# Altium PCB toasterBigBoard.PcbDoc
Units mil, origin at the board's own origin, x right, y up, seen from the top; angles counter-clockwise.
Board outline 2500 x 1000 mil, 2 copper layers (Top Layer, Bottom Layer); 28 components, 12 nets, 73 pads, 18 vias.
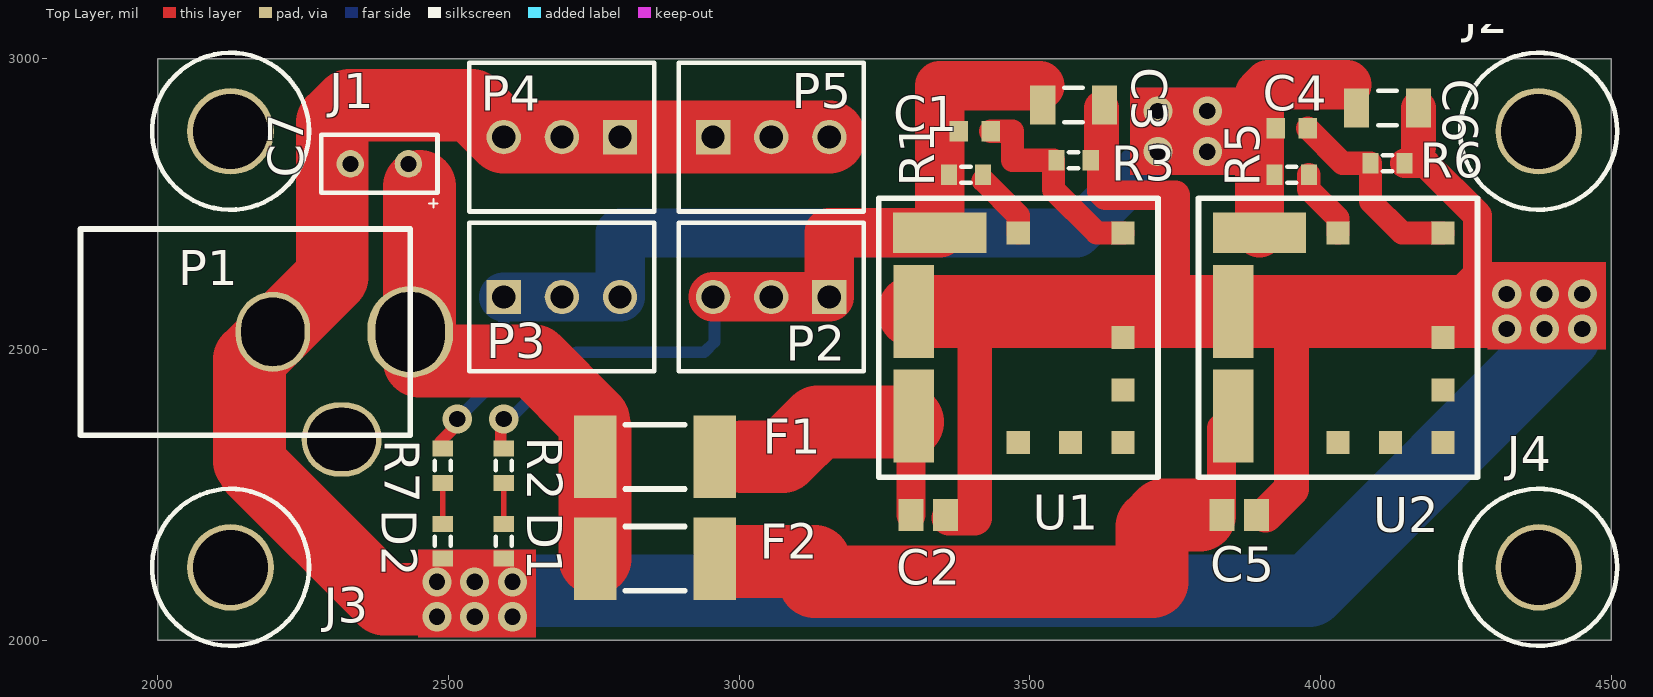
[diagram p0: Top Layer view]
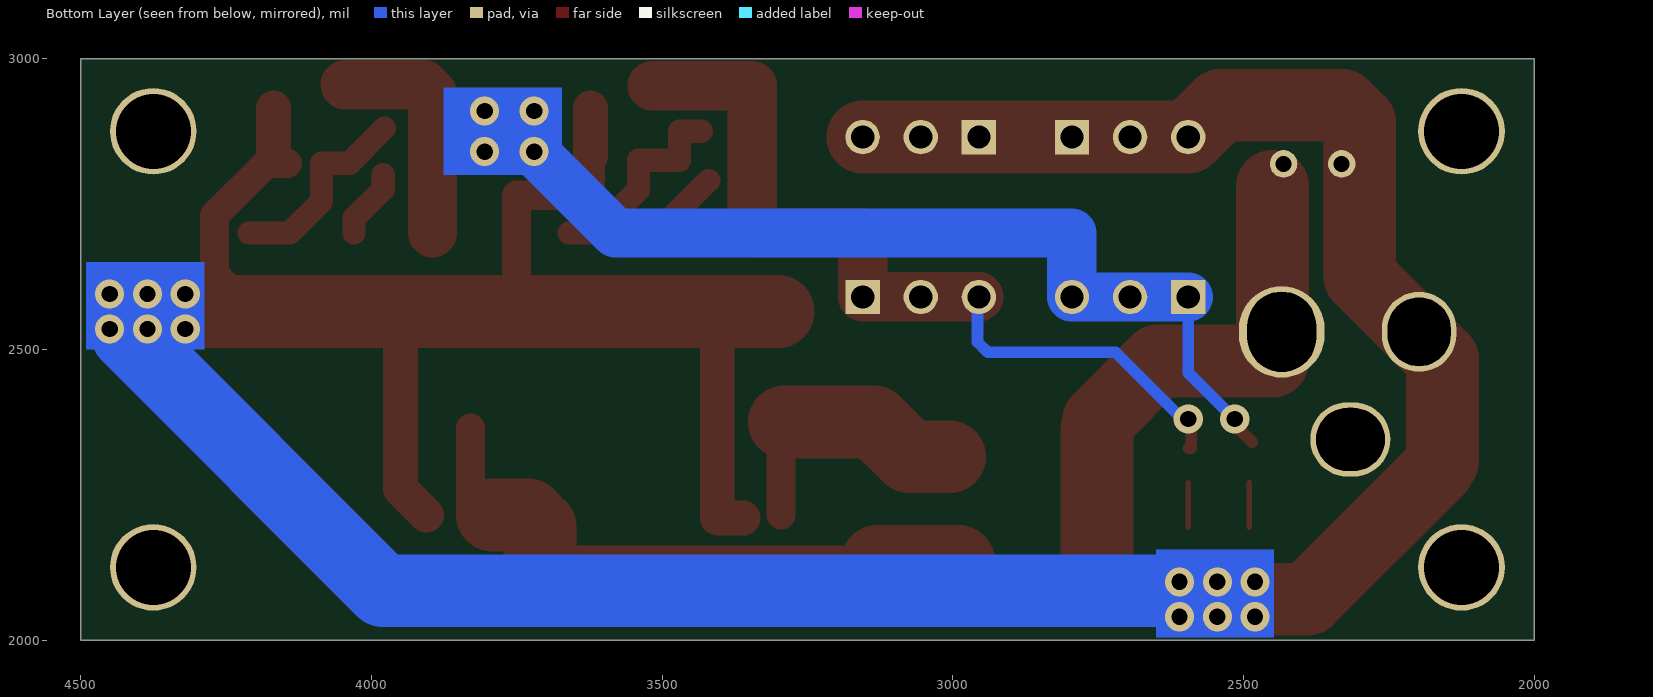
[diagram p1: Bottom Layer view, seen from below]

## Layer stack, top to bottom
Top Layer: signal copper 1.4
Dielectric: dielectric 12.6, FR-4, Dk 4.8
Bottom Layer: signal copper 1.4

## Board outline
2000,2000 4500,2000 4500,3000 2000,3000

## Design rules (kind name [scope] priority, off if disabled: settings)
Clearance [All] p1: gap=10
PolygonConnect [All] p1: connectstyle=Relief reliefconductorwidth=10 reliefentries=4 polygonreliefangle="90 Angle"
RoutingVias [All] p1: holewidth=28 width=50 viastyle="Through Hole" minholewidth=28 minwidth=50 maxholewidth=28 maxwidth=50
SilkscreenOverComponentPads [All] p1: minsilkscreentomaskgap=10
SolderMaskExpansion [All] p1: expansion=4
Width "Schematic Width Constraint_7" [InNet('NetC2_2')] p1: maxlimit=200 minlimit=50 preferedwidth=125 minimp=50.000000 maximp=50.000000 favimp=50.000000
Width "Schematic Width Constraint_6" [InNet('NetC5_2')] p2: maxlimit=200 minlimit=50 preferedwidth=125 minimp=50.000000 maximp=50.000000 favimp=50.000000
Width "Schematic Width Constraint_5" [InNet('GND')] p3: maxlimit=200 minlimit=50 preferedwidth=125 minimp=50.000000 maximp=50.000000 favimp=50.000000
Width "Schematic Width Constraint_4" [InNet('12V')] p4: maxlimit=200 minlimit=50 preferedwidth=125 minimp=50.000000 maximp=50.000000 favimp=50.000000
Width "Schematic Width Constraint_3" [InNet('NetC1_2')] p5: maxlimit=120 minlimit=20 preferedwidth=85 minimp=50.000000 maximp=50.000000 favimp=50.000000
Width "Schematic Width Constraint_2" [InNet('NetC4_2')] p6: maxlimit=120 minlimit=20 preferedwidth=85 minimp=50.000000 maximp=50.000000 favimp=50.000000
Width "Schematic Width Constraint_1" [InNet('6.25VOUT_2')] p7: maxlimit=120 minlimit=20 preferedwidth=85 minimp=50.000000 maximp=50.000000 favimp=50.000000
Width "Schematic Width Constraint" [InNet('6.25VOUT_1')] p8: maxlimit=120 minlimit=20 preferedwidth=85 minimp=50.000000 maximp=50.000000 favimp=50.000000
Width [All] p9: maxlimit=60 minlimit=10 preferedwidth=10 minimp=50.000000 maximp=50.000000 favimp=50.000000
27 further rules are at their usual default settings.

## Components (designator, comment, footprint, x,y, rotation, side; value= is the part's Value field where it differs from the comment)
C1 "CTUNE" CAPC1608L 3405,2875 r0 top
C2 "CIN" CAPC2012L 3325,2215 r180 top
C3 "COUT" CAPC3216L 3575,2920 r180 top
C4 "CTUNE" CAPC1608L 3950,2880 r0 top
C5 "CIN" CAPC2012L 3860,2215 r180 top
C6 "COUT" CAPC3216L 4115,2915 r180 top
C7 "Cap Pol2" RAD-POLAR-0.1 2340,2965 r180 top
D1 "LED Power 1" SurfaceMount(603) 2595,2170 r270 top
D2 "LED Power 2" SurfaceMount(603) 2490,2170 r270 top
F1 "PTC" J1-1812 2855,2315 r0 top
F2 "PTC" J1-1812 2855,2140 r0 top
J1 "Mechanical_Hole" #4_Screw_Hole 2125,2875 r0 top locked
J2 "Mechanical_Hole" #4_Screw_Hole 4375,2875 r0 top locked
J3 "Mechanical_Hole" #4_Screw_Hole 2125,2125 r0 top locked
J4 "Mechanical_Hole" #4_Screw_Hole 4375,2125 r0 top locked
P1 "Coax Connector" COAX_3pin 2316,2530 r180 top locked
P2 "Header 3" Euroblock-A98334 3055,2590 r180 top locked
P3 "Header 3" Euroblock-A98334 2695,2865 r180 top locked
P4 "Header 3" Euroblock-A98334 2695,2590 r0 top locked
P5 "Header 3" Euroblock-A98334 3055,2865 r0 top locked
R1 "RTUNE" J1-0603 3390,2800 r0 top
R2 "Resistor" J1-0603 2595,2300 r270 top
R3 "RTRIM" J1-0603 3575,2825 r180 top
R5 "RTUNE" J1-0603 3950,2800 r0 top
R6 "RTRIM" J1-0603 4115,2820 r180 top
R7 "Resistor" J1-0603 2490,2300 r270 top
U1 "DCDC-APXK004A0X" DCDC-APXK004A0X 3480,2520 r90 top locked
U2 "DCDC-APXK004A0X" DCDC-APXK004A0X 4030,2520 r90 top locked

## Footprints (in the part's own frame and the unit in brackets; to place one, negate y for a bottom-side part, rotate by r counter-clockwise, add the part's x,y. Pads: shape width x height; smd on the part's side, far side on the other; paste and mask are expansions set on the pad)
#4_Screw_Hole [mil] "#4 Screw Hole, 3.2766mm Hole Dia., Plated"
  round 149 hole 129: 1(0,0)
  silkscreen extent -135,-135 135,135
CAPC1608L [mm] "Chip Capacitor, Body 1.6x0.8mm, IPC High Density"
  rect 0.8x0.9 smd: 1(-0.7,0) 2(0.7,0)
  body extent -0.87,-0.48 0.87,0.48, height 1.3
CAPC2012L [mm] "Chip Capacitor, Body 2.0x1.3mm, IPC High Density"
  rect 1.1x1.4 smd: 1(-0.75,0) 2(0.75,0)
  body extent -1.1,-0.72 1.1,0.72, height 1.4
CAPC3216L [mm] "Chip Capacitor, Body 3.2x1.6mm, IPC High Density"
  rect 1.1x1.7 smd: 1(-1.35,0) 2(1.35,0)
  silkscreen extent -0.4,-0.75 0.4,0.75, body extent -1.7,-0.9 1.7,0.9, height 1.3
COAX_3pin [mm] "A barrel jack with 3 pins. The front is VCC, the back is GND, and the side is NC."
  oval 3.75x4 hole 3 slot 3.5 at 90 deg: 1(-3,0)
  oval 3.5x3.25 hole 2.75 slot 3 at 0 deg: 2(0,4.7)
  oval 3.25x3.5 hole 2.75 slot 3 at 90 deg: 3(3,0)
  silkscreen extent -3,-4.5 11.4,4.52, body extent -2.9,-4.39 11.38,4.42, height 11
DCDC-APXK004A0X [mm] "Footprint for the rone charger's DC/DC converter"
  rect 1.01x1.01 smd: 1(-4.575,0.005) 5(4.575,0.005) 6(4.575,-4.575) 7(0.005,-4.575) 8(-2.285,-4.575) 9(-4.575,-4.575) 10(-4.575,-2.285)
  rect 4.07x1.77 smd: 2(-3.425,4.575) 3(1.145,4.575)
  rect 1.77x4.07 smd: 4(4.575,3.435)
  silkscreen extent -6.09,-6.09 6.1,6.1, body extent -6.09,-6.09 6.1,6.1, height 7.24
Euroblock-A98334 [mm] "A 3x1 screw terminal block"
  rect 1.5x1.5 hole 1.016: 1(-2.54,0)
  round 1.5 hole 1.016: 2(0,0) 3(2.54,0)
  silkscreen extent -4.04,-3.25 4.04,3.25
J1-0603 [mm] "Chip Resistor, Body 1.6x0.8mm, IPC High Density"
  rect 0.7x0.9 smd: 1(-0.75,0) 2(0.75,0)
  silkscreen extent -0.2,-0.35 0.2,0.35, body extent -0.85,-0.48 0.85,0.48, height 0.9
J1-1812 [mm] "Standard surface mount chip - 45 x 32 mm"
  rect 1.85x3.6 smd: 1(-2.615,0) 2(2.615,0)
  silkscreen extent -1.3,-1.4 1.3,1.4
RAD-POLAR-0.1 [mm] "Radial capacitor with leads 2.54 mm apart. Polarized"
  round 1.2 hole 0.7: 1(-2.311,3.708) 2(0.229,3.708)
  silkscreen extent -3.58,2.44 1.5,5.62
SurfaceMount(603) [mm]
  rect 0.7x0.9 smd: 1(-0.75,0) 2(0.75,0)
  silkscreen extent -0.2,-0.35 0.2,0.35, body extent -0.85,-0.48 0.85,0.48, height 0.9

## Part data
C1 C2 C3 C4 C5 C6: library part Cap, "Capacitor"
C7: "Polarized Capacitor (Axial)"
D1 D2: library part LED
F1 F2: library part PTC_FUSE, "Fuse"
J1 J2 J3 J4: "A mechanical hole for mounting the board"
P1: library part COAX-M-3pin
P2 P3 P4 P5: "Header, 3-Pin"
R1 R3 R5 R6: library part Resistor, "Resistor"
U1 U2: "DC/DC converter for the rone charger"

## Via types
v1: diameter 50, hole 28, Top Layer to Bottom Layer, 18 vias

## Nets (pads, with @x,y where several pads share a name; then routed paths per layer and width w, separated by ;. In a path a pad name is that pad's centre, name@x,y a point inside that pad or via, vN(x,y) a via of type N, cw(c..) or ccw(c..) an arc to the next point about the centre after c; other vN are vias at no path point)
6.25VOUT_1: C1.1 C3.2 P2.1 P2.2 P2.3 R1.1 R2.1 U1.4 | length 1454.7
  Top Layer w20: v1@2590,2365 2590,2329.53 R2.1
  Top Layer w85: P2.3@2955.12,2590.12 3155.12,2590.12 3155.12,2700.12 U1.4 3344.76,2953.15 C3.2@3516.85,2953.15
  Bottom Layer w20: v1@2600,2375 2720,2495 2940,2495 2957.5,2512.5 P2.3@2957.5,2587.5
  other v1: 2595,2380
6.25VOUT_2: C4.1 C6.2 P4.1 P4.2 P4.3 R5.1 R7.1 U2.4 | length 1974.7
  Top Layer w20: R7.1@2485,2340 v1@2515,2370
  Top Layer w85: U2.4 3894.76,2939.76 3910,2955 4045,2955
  Bottom Layer w20: v1(2515,2380) 2595,2460 P4.1
  Bottom Layer w85: P4.1 P4.2 P4.3 2795,2700 3580,2700 v1(3720,2840)
  other v1: 3805,2840 3720,2910 3805,2910
12V: C7.1 F1.1 F2.1 P1.1 | length 885.5
  Top Layer w125: P1.1@2440,2515 P1.1@2445,2515 ; 2450,2780 2450,2480 2647.05,2480 2750,2377.05 2750,2365 2752.05,2362.95 F1.1 F2.1
GND: C2.1 C3.1 C5.1 C6.1 C7.2 D1.2 D2.2 P1.3 P3.1 P3.2 P3.3 P5.1 P5.2 P5.3 R3.1 R6.1 U1.3 U1.7 U2.3 U2.7 | length 6749.8
  Top Layer w50: 3623.15,2771.85 3623.15,2833.15 ; 3630,2765 3750,2765 3750,2565.08 ; R6.1 4180,2820 4270,2730 4270,2630.16 4204.92,2565.08
  Top Layer w60: C2.1@3360.47,2210 3405,2210 3405,2565.08 ; 3623.15,2833.15 C3.1@3623.15,2915 ; C5.1@3905,2215 3950,2260 3950,2565.08 ; 4168.15,2848.15 C6.1
  Top Layer w125: 2455,2070 2390,2070 2165,2295 2165,2300 2157.76,2307.24 2157.76,2482.76 2300,2625 2300,2890 2330,2920 2540,2920 P3.3 P3.2 P3.1 P5.1 P5.2 P5.3 ; U1.3 3405,2565.08 3750,2565.08 U2.3 3950,2565.08 4204.92,2565.08 4375.08,2565.08
  Bottom Layer w125: 2565,2075 2575,2085 3980,2085 4420,2525 4420,2575
  other v1: 2480,2040 2545,2040 2610,2040 2480,2100 2545,2100 2610,2100 4320,2535 4385,2535 4450,2535 4320,2595 4385,2595 4450,2595
NetC1_2: C1.2 R3.2 U1.6 | length 358.9
  Top Layer w40: C1.2 3470,2875 3470,2825 3540.47,2825 3540.47,2774.53 3614.88,2700.12 U1.6
NetC2_2: C2.2 F1.2 U1.2 | length 475.3
  Top Layer w50: C2.2 U1.2@3295.47,2380.75
  Top Layer w125: 3005,2315 3075,2315 3135,2375 U1.2@3289.72,2375
NetC4_2: C4.2 R6.2 U2.6 | length 345.4
  Top Layer w40: C4.2 4037.56,2820 R6.2 4085.47,2754.53 4139.88,2700.12 U2.6
NetC5_2: C5.2 F2.2 U2.2 | length 1089.2
  Top Layer w50: C5.2@3829.53,2215.94 U2.2@3829.53,2364.81
  Top Layer w125: F2.2@2990,2135 3130,2135 3130,2100 3710,2100 3710,2195 3730,2215 3792.03,2215
NetD1_1: D1.1 R2.2 | length 75.9
  Top Layer w10: D1.1@2595,2194.53 R2.2
NetD2_1: D2.1 R7.2 | length 75.9
  Top Layer w10: D2.1@2490,2194.53 R7.2
NetR1_2: R1.2 U1.5 | length 115.3
  Top Layer w40: R1.2@3419.53,2790.47 3479.8,2730.2 U1.5
NetR5_2: R5.2 U2.5 | length 120.7
  Top Layer w40: R5.2 3979.53,2775.47 4029.8,2725.2 U2.5
pads on no net: J1.1 J2.1 J3.1 J4.1 P1.2 U1.1 U1.8 U1.9 U1.10 U2.1 U2.8 U2.9 U2.10

## Other copper
Top Layer:
  region net 6.25VOUT_2: 3672.5,2950 3875,2950 3875,2800 3672.5,2800
  region net GND: 2447.5,2155 2650,2155 2650,2005 2447.5,2005
  region net GND: 4287.5,2650 4490,2650 4490,2500 4287.5,2500
Bottom Layer:
  region net 6.25VOUT_2: 3672.5,2950 3875,2950 3875,2800 3672.5,2800
  region net GND: 2447.5,2155 2650,2155 2650,2005 2447.5,2005
  region net GND: 4287.5,2650 4490,2650 4490,2500 4287.5,2500

## Silkscreen, mask and mechanical layers (free items; w line width, h text height)
Mechanical 1:
  lines w5: 2144.93,2530.43 cw(c2204.31,2531.35) 2200.05,2590.58 ; 2145,2530 ccw(c2204.37,2529.08) 2195.07,2470.43 ; 2195.11,2469.87 ccw(c2190.63,2529.08) 2250,2530 ; 2200.06,2590.41 cw(c2190.71,2531.77) 2250.06,2530 ; 2315.02,2289.56 cw(c2312.72,2343.45) 2258.8,2345.04 cw(c2312.72,2346.62) 2315.02,2400.52 ; 2315.05,2289.81 ccw(c2321.08,2343.41) 2375,2345 ccw(c2321.08,2346.59) 2315.06,2400.19 ; 2430.55,2599.44 ccw(c2438.48,2532.6) 2373.46,2550 2373.46,2508.06 ccw(c2437.9,2527.15) 2435,2460 ccw(c2427.15,2526.75) 2492.09,2509.44 ; 2432.09,2599.44 cw(c2429.19,2532.3) 2492.59,2554.62 2492.59,2509.44
  lines w10: 2000,2000 2000,3000 4495,3000 4495,2000 2000,2000